# Altium PCB PCB1.PcbDoc
Units mil, origin at the board's own origin, x right, y up, seen from the top; angles counter-clockwise.
Board outline 6003.94 x 3937.01 mil, 2 copper layers (Top Layer, Bottom Layer); 61 components, 63 nets, 308 pads, 0 vias.
Unrouted connection lines stored in the file: 103.
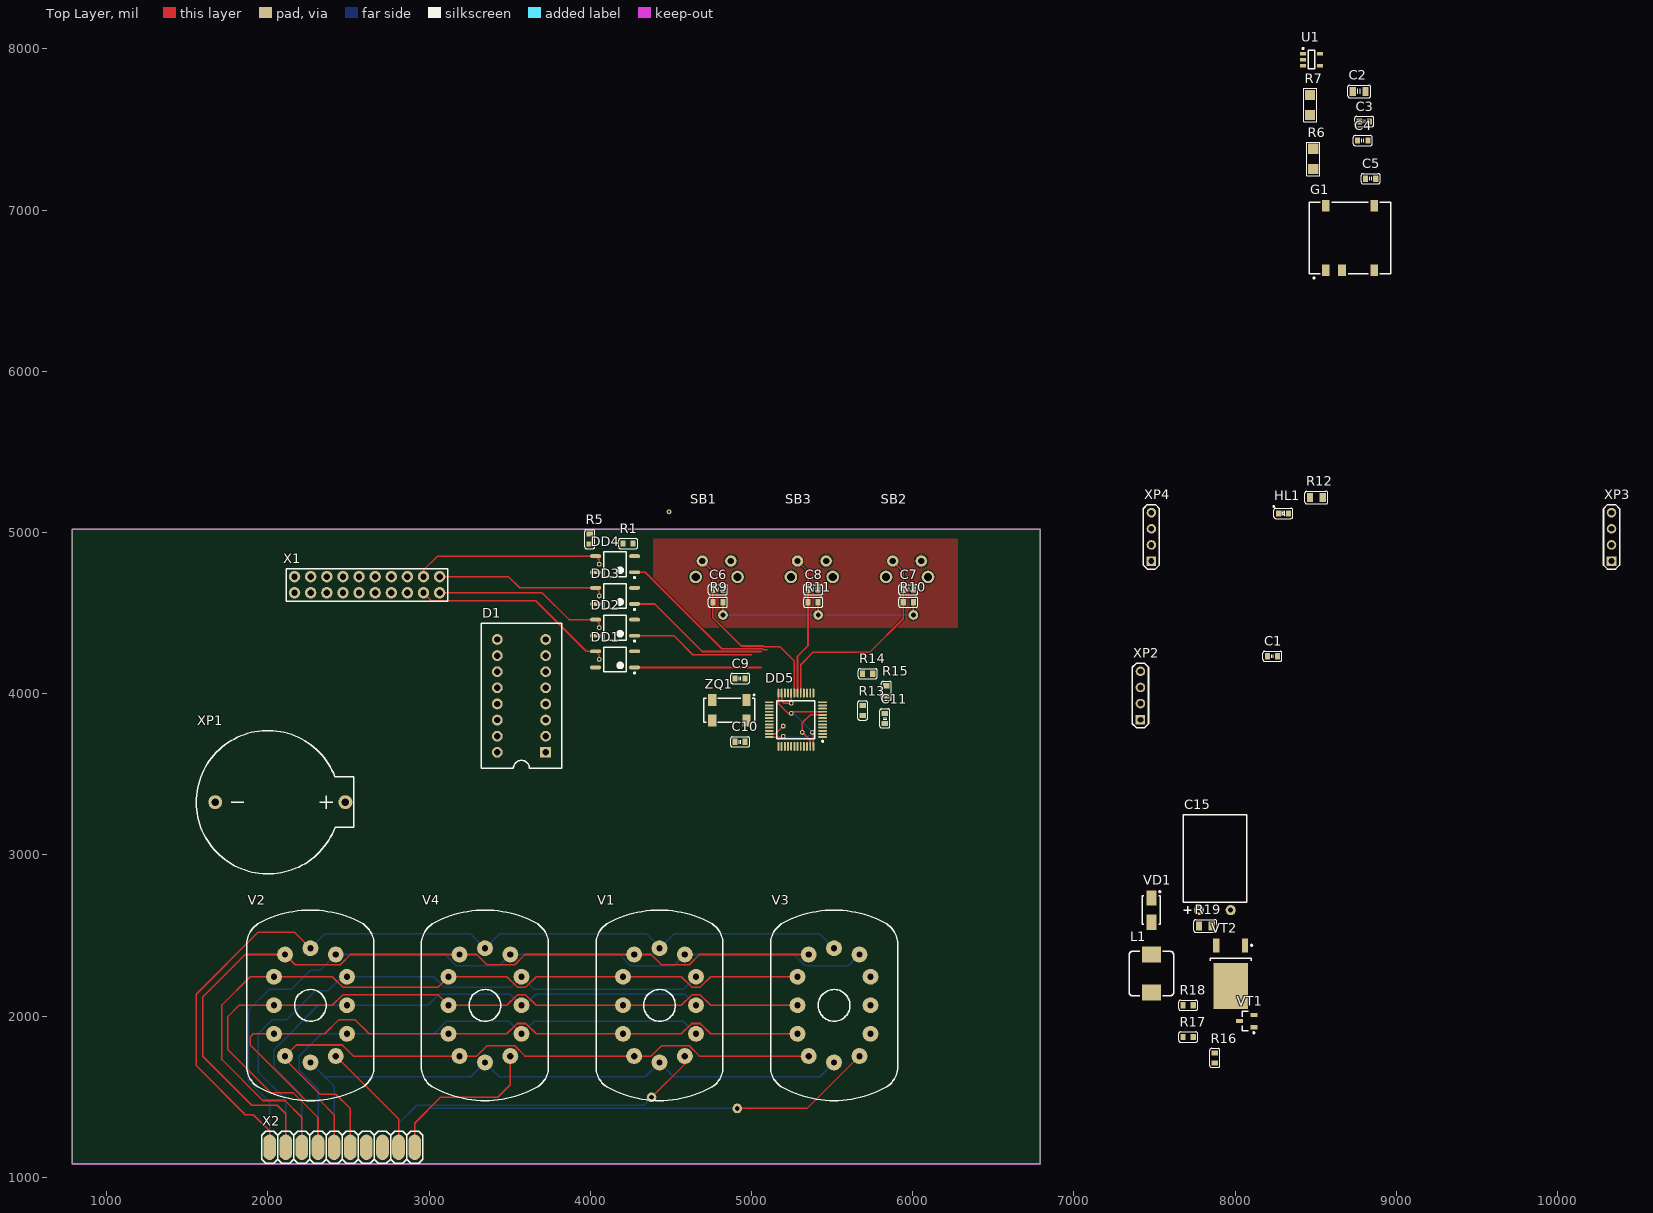
[diagram p0: Top Layer view]
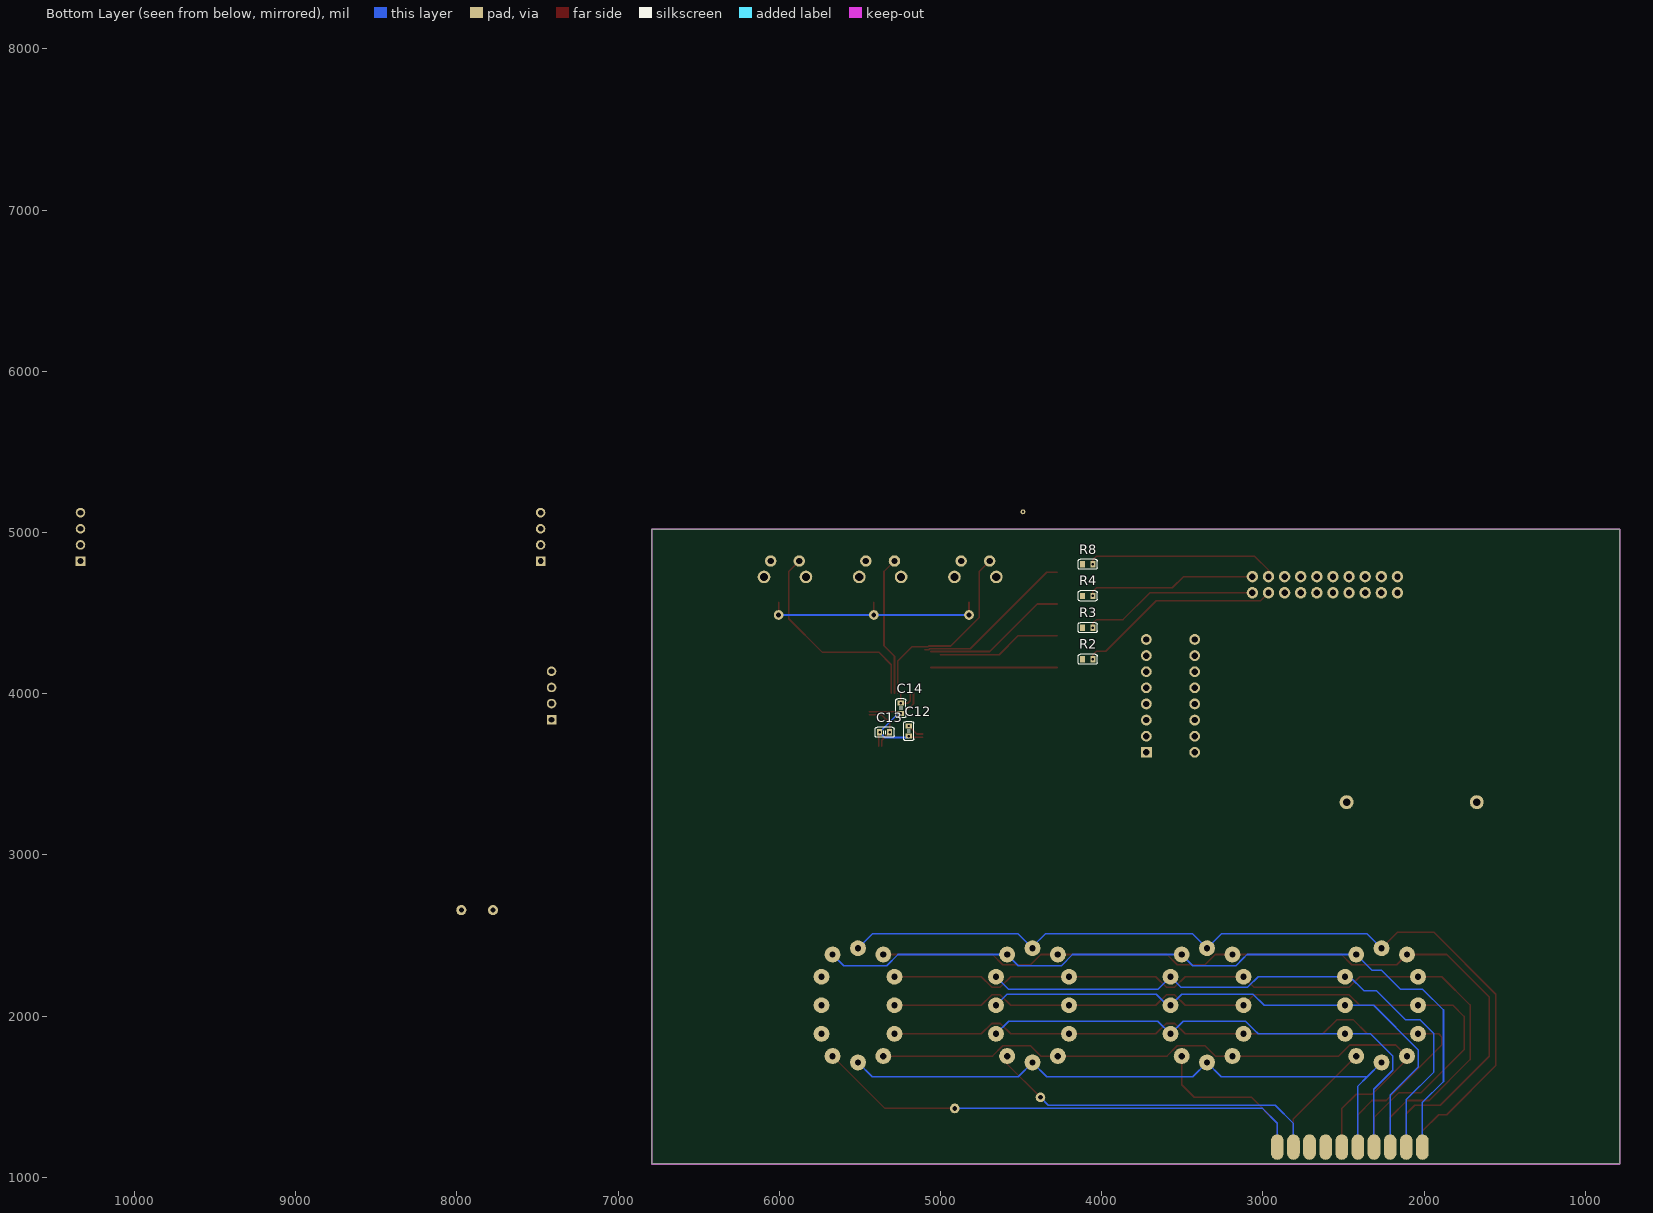
[diagram p1: Bottom Layer view, seen from below]

## Layer stack, top to bottom
Top Solder: solder mask 0.4, Solder Resist, Dk 3.5
Top Layer: signal copper 1.4
Dielectric 1: dielectric 12.6, FR-4, Dk 4.8
Bottom Layer: signal copper 1.4
Bottom Solder: solder mask 0.4, Solder Resist, Dk 3.5

## Board outline
787.4,1082.68 787.4,3444.88 787.4,5019.69 6791.34,5019.69 6791.34,1082.68

## Design rules (kind name [scope] priority, off if disabled: settings)
Clearance [All] p1: gap=7
PolygonConnect [All] p1: connectstyle=Relief reliefconductorwidth=10 reliefentries=4 polygonreliefangle="90 Angle" airgapwidth=10
RoutingVias [All] p1: holewidth=28 width=50 viastyle="Through Hole" minholewidth=28 minwidth=50 maxholewidth=28 maxwidth=50
SolderMaskExpansion [All] p1: expansion=4
Width [All] p1: maxlimit=10 minlimit=10 preferedwidth=10
30 further rules are at their usual default settings.

## Classes and differential pairs
component class Sheet1: C1 C2 C3 C4 C5 C6 C7 C8 C9 C10 C11 D1 DD1 DD2 DD3 DD4 DD5 G1 HL1 R1 R2 R3 R4 R5 R6 R7 R8 R9 R10 R11 R12 R13 R14 R15 SB1 SB2 SB3 U1 X1 XP1 XP2 XP3 XP4 ZQ1
component class Sheet2: C12 C13 C14 C15 L1 R16 R17 R18 R19 V1 V2 V3 V4 VD1 VT1 VT2 X2

## Components (designator, comment, footprint, x,y, rotation, side; value= is the part's Value field where it differs from the comment)
C1 "12p" "CAPACITOR 0603" 8199.8,4232.28 r0 top
C2 "12p" "CAPACITOR 0805" 8730.32,7736.22 r0 top
C3 "12p" "CAPACITOR 0603" 8769.68,7549.21 r0 top
C4 "12p" "CAPACITOR 0603" 8759.84,7431.1 r0 top
C5 "12p" "CAPACITOR 0603" 8809.06,7194.88 r0 top
C6 "12p" "CAPACITOR 0603" 4822.83,4645.67 r180 top
C7 "12p" "CAPACITOR 0603" 6003.94,4645.67 r180 top
C8 "12p" "CAPACITOR 0603" 5413.39,4645.67 r180 top
C9 "12p" "CAPACITOR 0603" 4960.63,4094.49 r180 top
C10 "12p" "CAPACITOR 0603" 4960.63,3700.79 r180 top
C11 "12p" "CAPACITOR 0603" 5826.77,3877.95 r270 top
C12 "12p" "CAPACITOR 0603" 5196.85,3799.21 r270 bottom
C13 "12p" "CAPACITOR 0603" 5314.96,3759.84 r0 bottom
C14 "12p" "CAPACITOR 0603" 5246.06,3940.95 r270 bottom
C15 "JRB2G4R7" "CAPASITOR R10" 7874.02,2657.48 r90 top
D1 "K155ID1_(7.62)" DIP-16_(7.62) 3572.83,3986.22 r180 top
DD1 "LTV-352T" SOP-4W 4153.54,4212.6 r180 top
DD2 "LTV-352T" SOP-4W 4153.54,4409.45 r180 top
DD3 "LTV-352T" SOP-4W 4153.54,4606.3 r180 top
DD4 "LTV-352T" SOP-4W 4153.54,4803.15 r180 top
DD5 "STM32F101C6T6" 48-LQFP 5275.59,3838.58 r180 top
G1 "R1SE-0505" R1SE-0505 8562.99,7027.56 r0 top
HL1 "LED" "LED 0603" 8267.72,5118.11 r0 top
L1 "CDRH74NP-471MC" SRR0603B 7480.31,2263.78 r90 top
R1 "300k" "RESISTOR 0603" 4202.76,4931.1 r0 top
R2 "300k" "RESISTOR 0603" 4055.12,4212.6 r0 bottom
R3 "300k" "RESISTOR 0603" 4055.12,4409.45 r0 bottom
R4 "300k" "RESISTOR 0603" 4055.12,4606.3 r0 bottom
R5 "300k" "RESISTOR 0603" 3996.06,4990.16 r270 top
R6 "300k" "RESISTOR 1206" 8484.25,7253.94 r90 top
R7 "300k" "RESISTOR 1206" 8464.57,7588.58 r90 top
R8 "300k" "RESISTOR 0603" 4118.11,4802.17 r180 bottom
R9 "300k" "RESISTOR 0603" 4822.83,4566.93 r180 top
R10 "300k" "RESISTOR 0603" 6003.94,4566.93 r180 top
R11 "300k" "RESISTOR 0603" 5413.39,4566.93 r180 top
R12 "300k" "RESISTOR 0805" 8464.57,5216.54 r0 top
R13 "300k" "RESISTOR 0603" 5688.98,3927.17 r270 top
R14 "300k" "RESISTOR 0603" 5688.98,4124.02 r0 top
R15 "300k" "RESISTOR 0603" 5836.61,3986.22 r90 top
R16 "300k" "RESISTOR 0603" 7874.02,1771.65 r270 top
R17 "300k" "RESISTOR 0603" 7677.17,1870.08 r0 top
R18 "300k" "RESISTOR 0603" 7677.17,2066.93 r0 top
R19 "300k" "RESISTOR 0805" 7775.59,2559.06 r0 top
SB1 "1-1825027-1" BUTTON-R 4783.46,4822.83 r180 top
SB2 "1-1825027-1" BUTTON-R 5964.57,4822.83 r180 top
SB3 "1-1825027-1" BUTTON-R 5374.02,4822.83 r180 top
U1 "TLV71333PDBVR" SOT23-5 8474.41,7933.07 r0 top
V1 "IN-12" "DIODE: IN-12" 4429.13,2066.93 r0 top
V2 "IN-12" "DIODE: IN-12" 2263.78,2066.93 r0 top
V3 "IN-12" "DIODE: IN-12" 5511.81,2066.93 r0 top
V4 "IN-12" "DIODE: IN-12" 3346.46,2066.93 r0 top
VD1 "ES1J" DO-214 7480.31,2657.48 r270 top
VT1 "MMBTA42LT1" SOT-23 8070.87,1968.5 r180 top
VT2 "IPD80R900P7" DPAK 7972.44,2263.78 r270 top
X1 "Connector, 20pin, 2.54mm, 500VAC, 3A" "CON: PBD-20" 2165.35,4625.98 r0 top
X2 "Connector, 20pin, 2.54mm, 500VAC, 3A" "CON: PLD-20-rebro" 2460.63,1190.94 r0 top
XP1 "KLS5-CR2032-01" CR2032 2007.87,3326.77 r0 top
XP2 "PLS-4" PLS-4 7412.4,3838.58 r90 top
XP3 "PLS-4" PLS-4 10334.65,4822.83 r90 top
XP4 "PLS-4" PLS-4 7480.32,4822.83 r90 top
ZQ1 "32.768 kHz" SMD08038C4 4862.2,3897.64 r180 top

## Footprints (in the part's own frame and the unit in brackets; to place one, negate y for a bottom-side part, rotate by r counter-clockwise, add the part's x,y. Pads: shape width x height; smd on the part's side, far side on the other; paste and mask are expansions set on the pad)
48-LQFP [mm] "QFP, 48-Leads, Body 7x7mm, Pitch 0.5mm, IPC Medium Density"
  oval 1.4x0.3 smd: 1(-4.2,2.75) 2(-4.2,2.25) 3(-4.2,1.75) 4(-4.2,1.25) 5(-4.2,0.75) 6(-4.2,0.25) 7(-4.2,-0.25) 8(-4.2,-0.75) 9(-4.2,-1.25) 10(-4.2,-1.75) 11(-4.2,-2.25) 12(-4.2,-2.75) 25(4.2,-2.75) 26(4.2,-2.25) 27(4.2,-1.75) 28(4.2,-1.25) 29(4.2,-0.75) 30(4.2,-0.25) 31(4.2,0.25) 32(4.2,0.75) 33(4.2,1.25) 34(4.2,1.75) 35(4.2,2.25) 36(4.2,2.75)
  oval 0.3x1.4 smd: 13(-2.75,-4.2) 14(-2.25,-4.2) 15(-1.75,-4.2) 16(-1.25,-4.2) 17(-0.75,-4.2) 18(-0.25,-4.2) 19(0.25,-4.2) 20(0.75,-4.2) 21(1.25,-4.2) 22(1.75,-4.2) 23(2.25,-4.2) 24(2.75,-4.2) 37(2.75,4.2) 38(2.25,4.2) 39(1.75,4.2) 40(1.25,4.2) 41(0.75,4.2) 42(0.25,4.2) 43(-0.25,4.2) 44(-0.75,4.2) 45(-1.25,4.2) 46(-1.75,4.2) 47(-2.25,4.2) 48(-2.75,4.2)
  round 0.5 on Mech1: ""(-4,4)
  silkscreen extent -4.33,-3 3,3.52, body extent -4.39,-4.39 4.39,4.39, height 1.55
BUTTON-R [mm]
  round 1.8 hole 1: 1(2.25,0) 2(-2.25,0)
  round 2 hole 1.3: 3(-3.3,2.5) 3(3.3,2.5)
  body extent -4.03,-8.3 4.03,4, height 7.05
"CAPACITOR 0603" [mm]
  rect 0.8x1 smd: 1(0,0) 2(1.6,0)
  silkscreen extent -0.7,-0.8 2.3,0.8, body extent -0.01,-0.38 1.64,0.42, height 0.81
"CAPACITOR 0805" [mm]
  rect 1x1.4 smd: 1(0,0) 2(2,0)
  silkscreen extent -0.8,-1 2.8,1, body extent 0.01,-0.6 2.01,0.6, height 1.26
"CAPASITOR R10" [mm]
  round 1.6 hole 0.8: 1(0,2.5) 2(0,-2.5)
  silkscreen extent -0.6,-5 15,5, body extent -0.3,-5 15,5, height 10
"CON: PBD-20" [mm]
  round 1.8 hole 1: 1(0,0) 2(0,2.54) 3(2.54,0) 4(2.54,2.54) 5(5.08,0) 6(5.08,2.54) 7(7.62,0) 8(7.62,2.54) 9(10.16,0) 10(10.16,2.54) 11(12.7,0) 12(12.7,2.54) 13(15.24,0) 14(15.24,2.54) 15(17.78,0) 16(17.78,2.54) 17(20.32,0) 18(20.32,2.54) 19(22.86,0) 20(22.86,2.54)
  round 0.5 on Top Overlay: ""(-1.775,-1.05)
  round 0.5 on Mech1: ""(-0.6,-0.7)
  silkscreen extent -1.3,-1.3 24.1,3.8, body extent -1.3,-1.3 24.1,3.78, height 8.4
"CON: PLD-20-rebro" [mm]
  oval 2x4 smd: 1(-11.43,-0.127) 3(-8.89,-0.127) 5(-6.35,-0.127) 7(-3.81,-0.127) 9(-1.27,-0.127) 11(1.27,-0.127) 13(3.81,-0.127) 15(6.35,-0.127) 17(8.89,-0.127) 19(11.43,-0.127)
  oval 2x4 smd far side: 2(-11.43,-0.087) 4(-8.89,-0.087) 6(-6.35,-0.087) 8(-3.81,-0.087) 10(-1.27,-0.087) 12(1.27,-0.087) 14(3.81,-0.087) 16(6.35,-0.087) 18(8.89,-0.087) 20(11.43,-0.087)
  silkscreen extent -12.7,-2.67 12.7,2.41, body extent -12.7,-10.72 12.7,0.82, height 1.77
CR2032 [mm]
  round 2.2 hole 1.2: 1(12,0) 2(-8.5,0)
  silkscreen extent -11.49,-11.29 13.31,11.29, body extent -11.3,-11.3 12.2,11.3, height 8
"DIODE: IN-12" [mm] "Vacuum Indicator"
  round 2.5 hole 1: 1(4.001,-8.002) 2(5.751,-4.501) 3(5.751,0) 4(5.751,4.501) 5(4.001,8.002) 6(0,9.002) 7(-4.001,8.002) 8(-5.751,4.501) 9(-5.751,0) 10(-5.751,-4.501) 11(-4.001,-8.002) 12(0,-9.002)
  silkscreen extent -10,-15.03 10,15
DIP-16_(7.62) [mm]
  rect 1.7x1.7 hole 1: 1(-3.81,8.89)
  round 1.7 hole 1: 2(-3.81,6.35) 3(-3.81,3.81) 4(-3.81,1.27) 5(-3.81,-1.27) 6(-3.81,-3.81) 7(-3.81,-6.35) 8(-3.81,-8.89) 9(3.81,-8.89) 10(3.81,-6.35) 11(3.81,-3.81) 12(3.81,-1.27) 13(3.81,1.27) 14(3.81,3.81) 15(3.81,6.35) 16(3.81,8.89)
  silkscreen extent -6.35,-11.43 6.35,11.43
DO-214 [mm]
  rect 2.4x1.55 smd: 1(-1.9,0) 2(1.9,0)
  silkscreen extent -3.02,-1.4 2.25,1.45, body extent -2.25,-1.4 2.25,1.39, height 2
DPAK [mm]
  rect 2.2x0.95 smd: 1(-4.45,2.28) 2(-4.45,-2.28)
  rect 7.2x5.5 smd: 3(1.95,0)
  silkscreen extent -4.57,-3.2 -2.05,3.43, body extent -2.4,-3.18 3.8,3.18, height 2.38
"LED 0603" [mm]
  rect 0.8x1 smd: 1(0,0) 2(1.6,0)
  silkscreen extent -0.8,-0.8 2.3,1.2, body extent -0.1,-0.5 1.7,0.5, height 0.5
PLS-4 [mm]
  rect 1.5x1.5 hole 0.9: 1(0,0)
  round 1.5 hole 0.9: 2(2.54,0) 3(5.08,0) 4(7.62,0)
  silkscreen extent -1.27,-1.27 8.89,1.27, body extent -1.12,-1.12 8.74,1.12, height 8.5
R1SE-0505 [mm]
  rect 1.2x1.8 smd: 1(0,-10.19) 2(2.54,-10.19) 4(7.62,-10.19) 5(7.62,0) 8(0,0)
  silkscreen extent -2.6,-11.52 10.2,0.5, body extent -2.6,-10.65 10.2,0.45, height 7
"RESISTOR 0603" [mm]
  rect 0.8x1 smd: 1(0,0) 2(1.6,0)
  silkscreen extent -0.7,-0.8 2.3,0.8, body extent -0.01,-0.38 1.64,0.42, height 0.31
"RESISTOR 0805" [mm]
  rect 1x1.4 smd: 1(0,0) 2(2,0)
  silkscreen extent -0.8,-1 2.8,1, body extent 0.01,-0.6 2.01,0.6, height 0.52
"RESISTOR 1206" [mm]
  rect 1.6x1.6 smd: 1(0,0) 2(3.2,0)
  silkscreen extent -1.03,-1.03 4.23,1.02, body extent 0.01,-0.8 3.22,0.8, height 0.52
SMD08038C4 [mm]
  rect 1.3x1.9 smd: 1(-2.7,-1.6) 2(2.7,-1.6) 3(2.7,1.6) 4(-2.7,1.6)
  silkscreen extent -4,-2.5 4,1.9, body extent -4,-2.1 4,2.1, height 2.5
SOP-4W [mm]
  oval 1.75x0.6 smd: 1(-3.075,1.27) 2(-3.075,-1.27) 3(3.075,-1.27) 4(3.075,1.27)
  silkscreen extent -3.2,-1.95 1.8,2.24, body extent -2.2,-1.95 2.2,1.95, height 2
SOT23-5 [mm]
  rect 0.95x0.55 smd: 1(-1.35,0.95) 2(-1.35,0) 3(-1.35,-0.95) 4(1.35,-0.95) 5(1.35,0.95)
  silkscreen extent -1.47,-1.45 0.5,1.9, body extent -0.87,-1.45 0.87,1.45, height 0.9
SOT-23 [mm]
  rect 1.1x0.65 smd: 1(-1.15,0.95) 2(-1.15,-0.95) 3(1.15,0)
  silkscreen extent -1.28,-1.55 0.7,1.95, body extent -0.7,-1.52 0.7,1.53, height 1.1
SRR0603B [mm]
  rect 2.5x3 smd: 1(-3,0) 2(3,0)
  silkscreen extent -3.5,-3.5 3.5,3.5, body extent -3.5,-3.5 3.5,3.5, height 3.3

## Part data
C1 C2 C3 C4 C5 C6 C7 C8 C9 C10 C11 C12 C13 C14: library part SMD-CAP, "Capacitor"
C15: library part TC-D, "TC-D"
DD1 DD2 DD3 DD4: library part ACPL-217-500E, "Isolator"
DD5: library part STM32F103C8T6, "Controller"
G1: "POWER"
L1: library part Inductor
R1 R2 R3 R4 R5 R6 R7 R8 R9 R10 R11 R12 R13 R14 R15 R16 R17 R18 R19: library part SMD-RES_1, "Resistor"
SB1 SB2 SB3: library part SWITCH, "Button"
U1: library part TPS76333DBVR, "POWER"
V1 V2 V3 V4: "Vacuum Indicator"
VD1: library part D-Diod, "Diod"
VT1: library part Transistor-NPN, "Transistor"
VT2: library part Channel-N, "Transistor"
X1: library part PBD-20
X2: library part PLD-20-REBRO
XP1: library part XP2, "Connector"
XP2 XP3 XP4: library part XP4, "Connector"
ZQ1: library part Quartz-ALARM, "Quartz"

## Free pads (board coordinates)
  round 60 hole 30: 2(4911.42,1427.17) 3(4379.92,1496.06) 4(4379.92,1496.06) 5(4822.83,4488.19) 5(5413.39,4488.19) 5(6003.94,4488.19)
  round 30 hole 15: 6(4055.12,4212.6) 6(4055.12,4409.45) 6(4055.12,4606.3) 6(4055.12,4803.15) 6(4488.19,5127.95) 6(5196.85,3736.22) 6(5196.85,3799.21) 6(5246.06,3877.95) 6(5246.06,3940.95) 6(5314.96,3759.84) 6(5377.95,3759.84)

## Nets (pads, with @x,y where several pads share a name; then routed paths per layer and width w, separated by ;. In a path a pad name is that pad's centre, name@x,y a point inside that pad or via, vN(x,y) a via of type N, cw(c..) or ccw(c..) an arc to the next point about the centre after c; other vN are vias at no path point)
3V3: C4.2 C5.2 C12.2 C13.2 C14.2 DD5.9 DD5.24 DD5.36 DD5.48 HL1.2 pad.5 pad.6@5196.85,3736.22 pad.6@5246.06,3877.95 pad.6@5377.95,3759.84 R9.1 R10.1 R11.1 R14.2 R15.2 U1.5 XP4.1 | length 2333.9
  Top Layer w10: pad.5@4822.83,4488.19 R9.1 ; DD5.36 5190.95,3730.32 pad.6@5196.85,3736.22 ; DD5.24 5167.32,3937.01 5226.38,3877.95 5246.06,3877.95 5255.91,3887.8 DD5.9 ; pad.6@5377.95,3759.84 5383.86,3753.94 DD5.48 ; pad.5@5413.39,4488.19 R11.1 ; pad.5@6003.94,4488.19 R10.1
  Bottom Layer w10: pad.5@4822.83,4488.19 5413.39,4488.19 pad.5@6003.94,4488.19 ; C12.2 5196.85,3728.16 5346.27,3728.16 C13.2 pad.6@5259.84,3877.95
5V: C3.2 G1.5 L1.1 R6.1 R17.1 R18.1 U1.1 U1.3 XP2.1
180V: C15.1 R5.1 R19.1 VD1.1
BUT1: C6.2 DD5.19 R9.2 SB1.1 | length 1193.7
  Top Layer w10: SB1.1 4759.84,4757.87 C6.2 R9.2 4759.84,4472.44 4936.47,4295.81 5073.14,4295.81 5077.61,4291.34 5177.17,4291.34 5265.75,4202.76 DD5.19
BUT2: C7.2 DD5.17 R10.2 SB2.1 | length 1314.8
  Top Layer w10: DD5.17 5305.12,4179.81 5383.31,4258 5734.38,4258 5940.94,4464.57 R10.2 C7.2 5940.94,4757.87 SB2.1
BUT3: C8.2 DD5.18 R11.2 SB3.1 | length 872.7
  Top Layer w10: DD5.18 5285.43,4232.28 5350.39,4297.24 R11.2 C8.2 5350.39,4757.88 SB3.1
CATH1: D1.3 DD5.32
CATH2: D1.6 DD5.25
CATH3: D1.7 DD5.14
CATH4: D1.4 DD5.15
CLK: DD5.37 XP4.3
DIO: DD5.34 XP4.2
GND: C1.1 C3.1 C4.1 C5.1 C6.1 C7.1 C8.1 C9.1 C10.1 C11.1 C12.1 C13.1 C14.1 C15.2 DD5.8 DD5.20 DD5.23 DD5.35 DD5.47 G1.4 pad.6@5196.85,3799.21 pad.6@5246.06,3940.95 pad.6@5314.96,3759.84 R1.1 R2.2 R3.2 R4.2 R7.1 R8.1 R13.2 R19.2 SB1.2 SB2.2 SB3.2 U1.2 VT1.3 VT2.3 XP1.2 XP2.4 XP4.4 | length 595.2
  Top Layer w10: DD5.35 5147.64,3750 pad.6@5196.85,3799.21 ; DD5.23 5187.01,3956.69 5202.75,3940.95 5246.06,3940.95 DD5.20 ; DD5.47 5364.17,3710.63 5314.96,3759.84 5314.96,3818.9 5364.17,3868.11 DD5.8
ISO5V: C2.2 G1.2 R6.2 XP3.1
ISOGND: C2.1 G1.1 R7.2 XP3.4
LED: DD5.2 R12.2
LED_0: D1.16 X1.1
LED_0_2: V1.2 V2.2 V3.2 V4.2 X2.8 | length 3248.4
  Bottom Layer w10: X2.8@2312.99,1200.79 2312.99,1545.28 2194.88,1663.39 2194.88,1751.97 2332.64,1889.73 V2.2 3029.22,1889.73 3055.82,1916.32 ; 3055.82,1916.33 3108,1968.5 3494.11,1968.5 V4.2 3651.66,1968.5 4576.78,1968.5 V1.2
LED_1: D1.15 X1.10
LED_1_2: V1.11 V2.11 V3.11 V4.11 X2.11 | length 4202.7
  Top Layer w10: X2.11 2510.63,1426.38 2421.26,1515.75 2322.83,1515.75 2106.27,1732.32 V2.11 2175.23,1820.87 2460.63,1820.87 2529.59,1751.91 V4.11 3295.02,1751.9 3359.24,1816.12 3530.57,1816.12 3594.78,1751.9 V1.11 4377.7,1751.9 4441.91,1816.12 4613.24,1816.12 4677.46,1751.9 V3.11
LED_2: D1.8 X1.9
LED_2_2: V1.10 V2.10 V3.10 V4.10 X2.9 | length 4535.3
  Top Layer w10: X2.9 2410.63,1388.58 2322.83,1476.38 2234.25,1476.38 1889.76,1820.87 1889.76,1870.08 1909.41,1889.73 V2.10 2352.33,1889.73 2440.94,1978.35 2539.37,1978.35 2627.99,1889.73 V4.10 3482.07,1889.73 3546.28,1953.94 3599.48,1953.94 3663.69,1889.73 V1.10 4564.75,1889.73 4628.96,1953.94 4682.16,1953.94 4746.37,1889.73 V3.10
LED_3: D1.9 X1.8
LED_3_2: V1.9 V2.9 V3.9 V4.9 X2.7 | length 4845.8
  Top Layer w10: X2.7 2310.63,1370.47 2155.51,1525.59 2017.72,1525.59 1751.97,1791.34 1751.97,1998.03 1820.87,2066.93 V2.9 2399.4,2066.93 2463.61,2131.14 3055.82,2131.14 V4.9 3482.07,2066.93 3546.28,2131.14 3599.48,2131.14 3663.69,2066.93 V1.9 4564.75,2066.93 4628.96,2131.14 4682.16,2131.14 4746.37,2066.93 V3.9
LED_4: D1.13 X1.7
LED_4_2: V1.8 V2.8 V3.8 V4.8 X2.5 | length 4972
  Top Layer w10: X2.5 2210.63,1372.05 2106.3,1476.38 1968.5,1476.38 1714.7,1730.18 1714.7,2069.03 1889.8,2244.13 V2.8 2399.4,2244.13 2463.61,2179.92 3055.82,2179.92 V4.8 3482.07,2244.13 3546.28,2179.92 3599.48,2179.92 3663.69,2244.13 V1.8 4564.75,2244.13 4628.96,2179.92 4682.16,2179.92 4746.37,2244.13 V3.8
LED_5: D1.14 X1.6
LED_5_2: V1.7 V2.7 V3.7 V4.7 X2.3 | length 5264.2
  Top Layer w10: X2.3 2110.63,1393.31 2057.09,1446.85 1899.61,1446.85 1596.38,1750.07 1596.38,2118.04 1860.3,2381.95 V2.7 2170.48,2317.74 2447.89,2317.74 2512.1,2381.95 V4.7 3295.02,2381.95 3359.24,2317.74 3530.57,2317.74 3594.78,2381.95 V1.7 4377.7,2381.95 4441.91,2317.74 4613.24,2317.74 4677.46,2381.95 V3.7
LED_6: D1.11 X1.5
LED_6_2: V1.6 V2.6 V3.6 V4.6 X2.1 | length 5549.9
  Top Layer w10: X2.1 2010.63,1286.61 1909.45,1387.8 1860.24,1387.8 1554.62,1693.41 1554.62,2135.33 1938.98,2519.68 2165.43,2519.68 V2.6
  Bottom Layer w10: V2.6 2352.29,2509.84 3257.95,2509.84 V4.6 3434.97,2509.84 4350.39,2509.84 4429.13,2431.1 V1.6 4517.65,2509.84 5423.3,2509.84 V3.6
LED_7: D1.10 X1.4
LED_7_2: V1.5 V2.5 V3.5 V4.5 X2.2 | length 5017.4
  Bottom Layer w10: X2.2@2010.63,1177.68 2010.63,1463.78 1879.92,1594.49 1879.92,2037.4 2007.87,2165.35 2145.67,2165.35 2263.78,2283.46 2322.8,2283.46 V2.5 3098.14,2381.95 3124.73,2355.36 3167.1,2312.99 3435.01,2312.99 V4.5 4180.81,2381.95 4249.77,2312.99 4517.69,2312.99 V1.5 5263.49,2381.95 5332.45,2312.99 5600.36,2312.99 V3.5
LED_8: D1.1 X1.3
LED_8_2: V1.4 V2.4 V3.4 V4.4 X2.4 | length 3765
  Bottom Layer w10: X2.4@2110.63,1177.68 2110.63,1481.89 1938.98,1653.54 1938.98,1889.76 2027.56,1978.35 2116.14,1978.35 2295.96,2158.17 2374.7,2158.17 2460.67,2244.13 V2.4 3029.22,2244.13 3093.43,2179.92 3508.67,2179.92 V4.4 3651.66,2165.35 4576.78,2165.35 V1.4
LED_9: D1.2 X1.2
LED_9_2: V1.3 V2.3 V3.3 V4.3 X2.6 | length 3531.9
  Bottom Layer w10: X2.6@2210.63,1177.68 2210.63,1509.84 2037.4,1683.07 2037.4,1791.34 2312.99,2066.93 V2.3 2992.13,2066.93 3061.02,2135.83 3503.98,2135.83 V4.3 3592.83,2066.93 3661.73,2135.83 4586.66,2135.83 V1.3
LED_A1: DD1.3 pad.6@4055.12,4212.6 R2.1 X1.17 | length 1277
  Top Layer w10: X1.17 3014.57,4576.77 3661.42,4576.77 3975.59,4262.6 DD1.3 4055.12,4239.96 pad.6@4055.12,4212.6
LED_A1_2: pad.3 pad.4 V1.1 X2.18 | length 2126.1
  Top Layer w10: pad.4 4586.65,1702.79 V1.1
  Bottom Layer w10: X2.18@2810.63,1185.94 2810.63,1334.25 2923.54,1447.17 4331.02,1447.17 pad.4
LED_A2: DD2.3 pad.6@4055.12,4409.45 R3.1 X1.19 | length 1095.5
  Top Layer w10: X1.19 3700.79,4625.98 3867.32,4459.45 DD2.3 4055.12,4436.81 pad.6@4055.12,4409.45
LED_A2_2: V2.1 X2.17 | length 727.2
  Top Layer w10: V2.1 2810.63,1362.57 X2.17
LED_A3: DD3.3 pad.6@4055.12,4606.3 R4.1 X1.20 | length 1055.4
  Top Layer w10: X1.20 3492.52,4725.98 3562.2,4656.3 DD3.3 4055.12,4633.66 pad.6@4055.12,4606.3
LED_A3_2: pad.2 V3.1 X2.20 | length 3080.9
  Top Layer w10: pad.2 5344.58,1427.17 V3.1
  Bottom Layer w10: X2.20@2910.63,1185.94 2910.63,1335.83 3001.97,1427.17 pad.2
LED_A4: DD4.3 pad.6@4055.12,4803.15 R8.2 X1.18 | length 1202.9
  Top Layer w10: X1.18 2965.35,4766.54 3051.97,4853.15 DD4.3 4055.12,4830.51 pad.6@4055.12,4803.15
LED_A4_2: V4.1 X2.19 | length 1019.3
  Top Layer w10: X2.19 2910.63,1335.83 3070.87,1496.06 3425.2,1496.06 3503.97,1574.84 V4.1
LED_DT_2: V1.12 V2.12 V3.12 V4.12 X2.10 | length 3938.5
  Bottom Layer w10: V2.12 2352.29,1624.02 ; X2.10@2410.63,1177.68 2410.63,1565.68 2352.29,1624.02 ; V3.12 5423.3,1624.02 4517.65,1624.02 V1.12 4340.62,1624.02 3434.97,1624.02 V4.12 3257.95,1624.02 2352.29,1624.02
NetC9_2: C9.2 DD5.3 ZQ1.1
NetC10_2: C10.2 DD5.4 ZQ1.4
NetDD1_2: DD1.2 DD2.2 DD3.2 DD4.2 R1.2
NetDD1_4: DD1.4 DD2.4 DD3.4 DD4.4 R5.2
NetDD5_44: DD5.44 R13.1 R14.1
NetHL1_1: HL1.1 R12.1
NetL1_2: L1.2 VD1.2 VT2.2
NetR16_1: R16.1 R17.2 VT1.1
NetR18_2: R18.2 VT1.2 VT2.1
NRST: C11.2 DD5.7 R15.1
OPT1: DD1.1 DD5.13 | length 784.4
  Top Layer w10: DD1.1 5059.06,4162.6
OPT2: DD2.1 DD5.12 | length 774
  Top Layer w10: DD2.1 4518.5,4359.45 4635.83,4242.13 5000,4242.13
OPT3: DD3.1 DD5.11 | length 906.4
  Top Layer w10: DD3.1 4400.39,4556.3 4694.88,4261.81 5059.06,4261.81
OPT4: DD4.1 DD5.10 | length 1023.3
  Top Layer w10: DD4.1 4341.34,4753.15 4815.68,4278.81 5066.1,4278.81 5073.25,4271.65 5098.43,4271.65
PWM: DD5.40 R16.2
U_RX: DD5.31 XP2.2
U_TX: DD5.30 XP2.3
VBAT: C1.2 DD5.1 XP1.1
pads on no net: D1.5 D1.12 DD5. DD5.5 DD5.6 DD5.16 DD5.21 DD5.22 DD5.26 DD5.27 DD5.28 DD5.29 DD5.33 DD5.38 DD5.39 DD5.41 DD5.42 DD5.43 DD5.45 DD5.46 G1.8 SB1.3 SB2.3 SB3.3 U1.4 X1. X1.11 X1.12 X1.13 X1.14 X1.15 X1.16 X2.12 X2.13 X2.14 X2.15 X2.16 XP3.2 XP3.3 ZQ1.2 ZQ1.3

## Polygon pours and split planes (outlines as drawn)
GND on Top Layer "Top Layer-No Net" (solid, remove dead copper, pour order 0): 4389.76,4960.63 5688.98,4960.63 6279.53,4960.63 6279.53,4409.45 4389.76,4409.45

## Keep-outs
Keep-Out Layer:
  lines w10: 787.4,1082.68 6102.36,1082.68 6791.34,1082.68 6791.34,5019.69 787.4,5019.69 787.4,3444.88 787.4,1082.68